# Altium PCB TM1638_10.PcbDoc
Units mil, origin at the board's own origin, x right, y up, seen from the top; angles counter-clockwise.
Board outline 3950 x 2760 mil, 2 copper layers (Top Layer, Bottom Layer); 45 components, 31 nets, 145 pads, 59 vias.
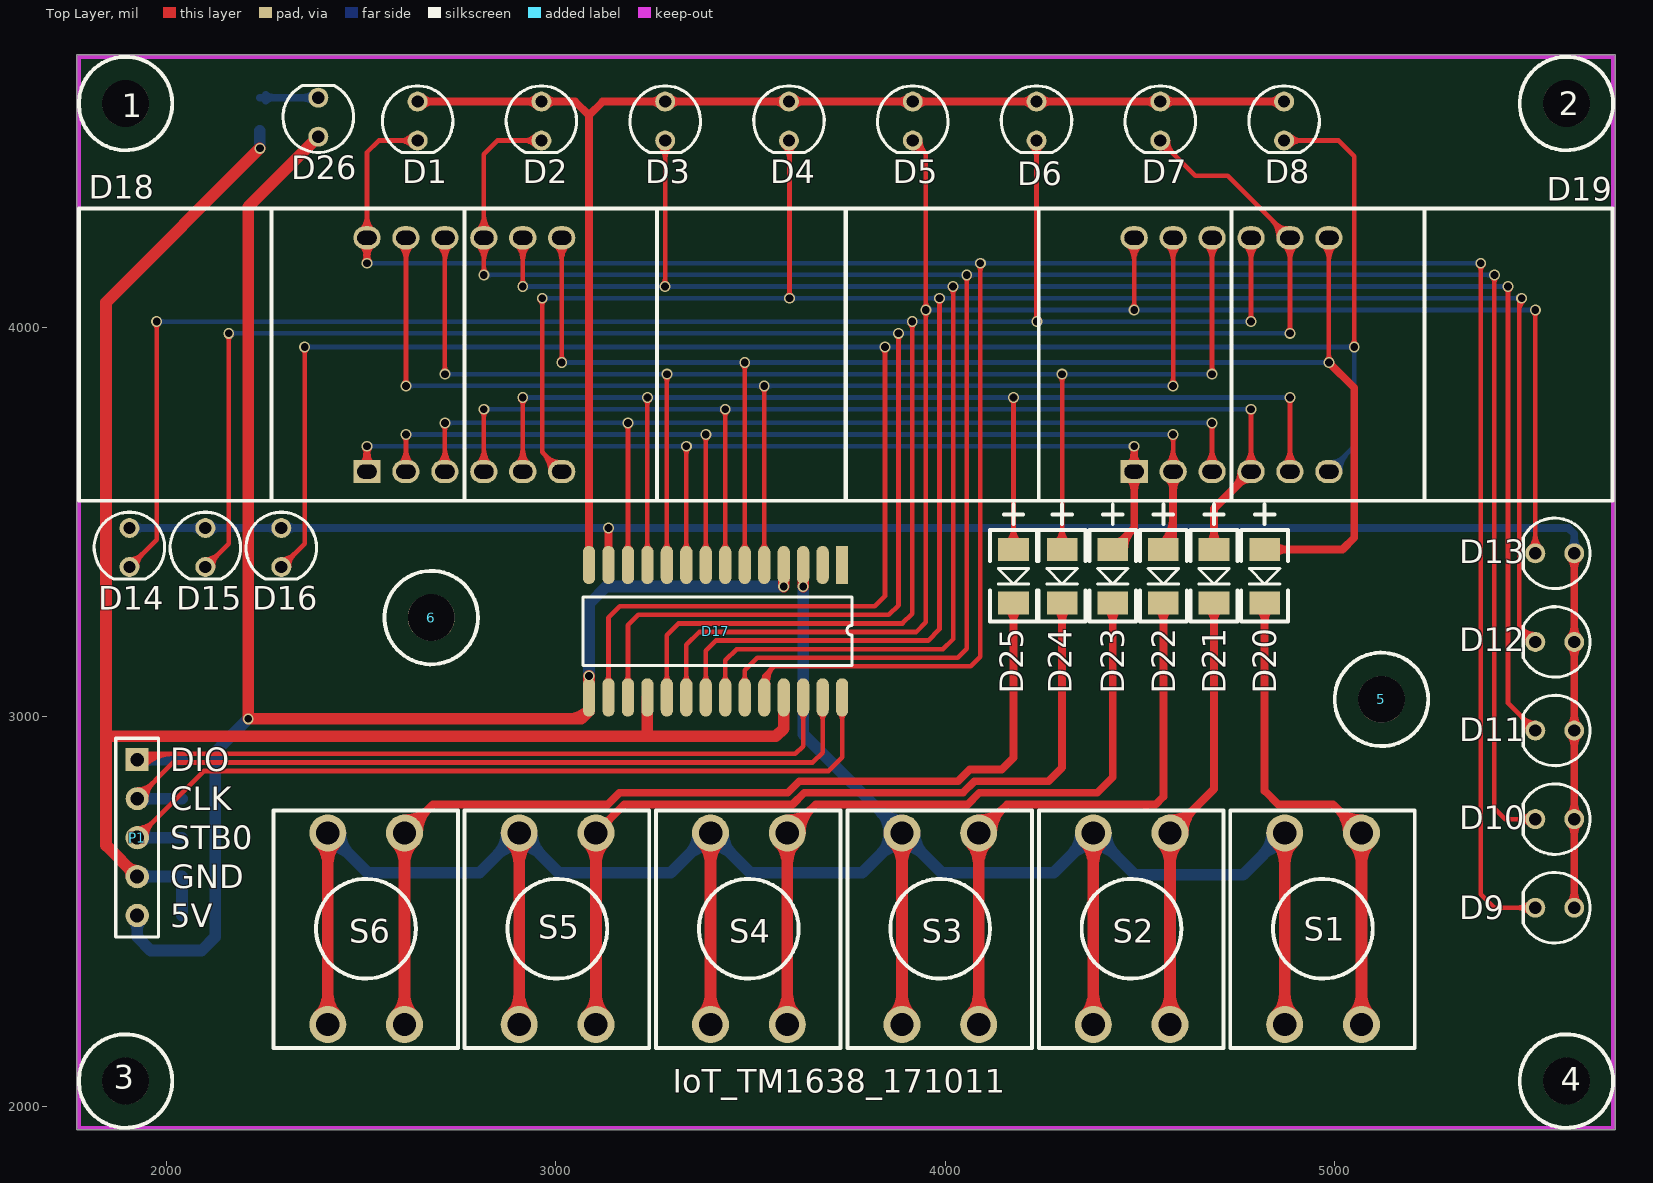
[diagram p0: Top Layer view]
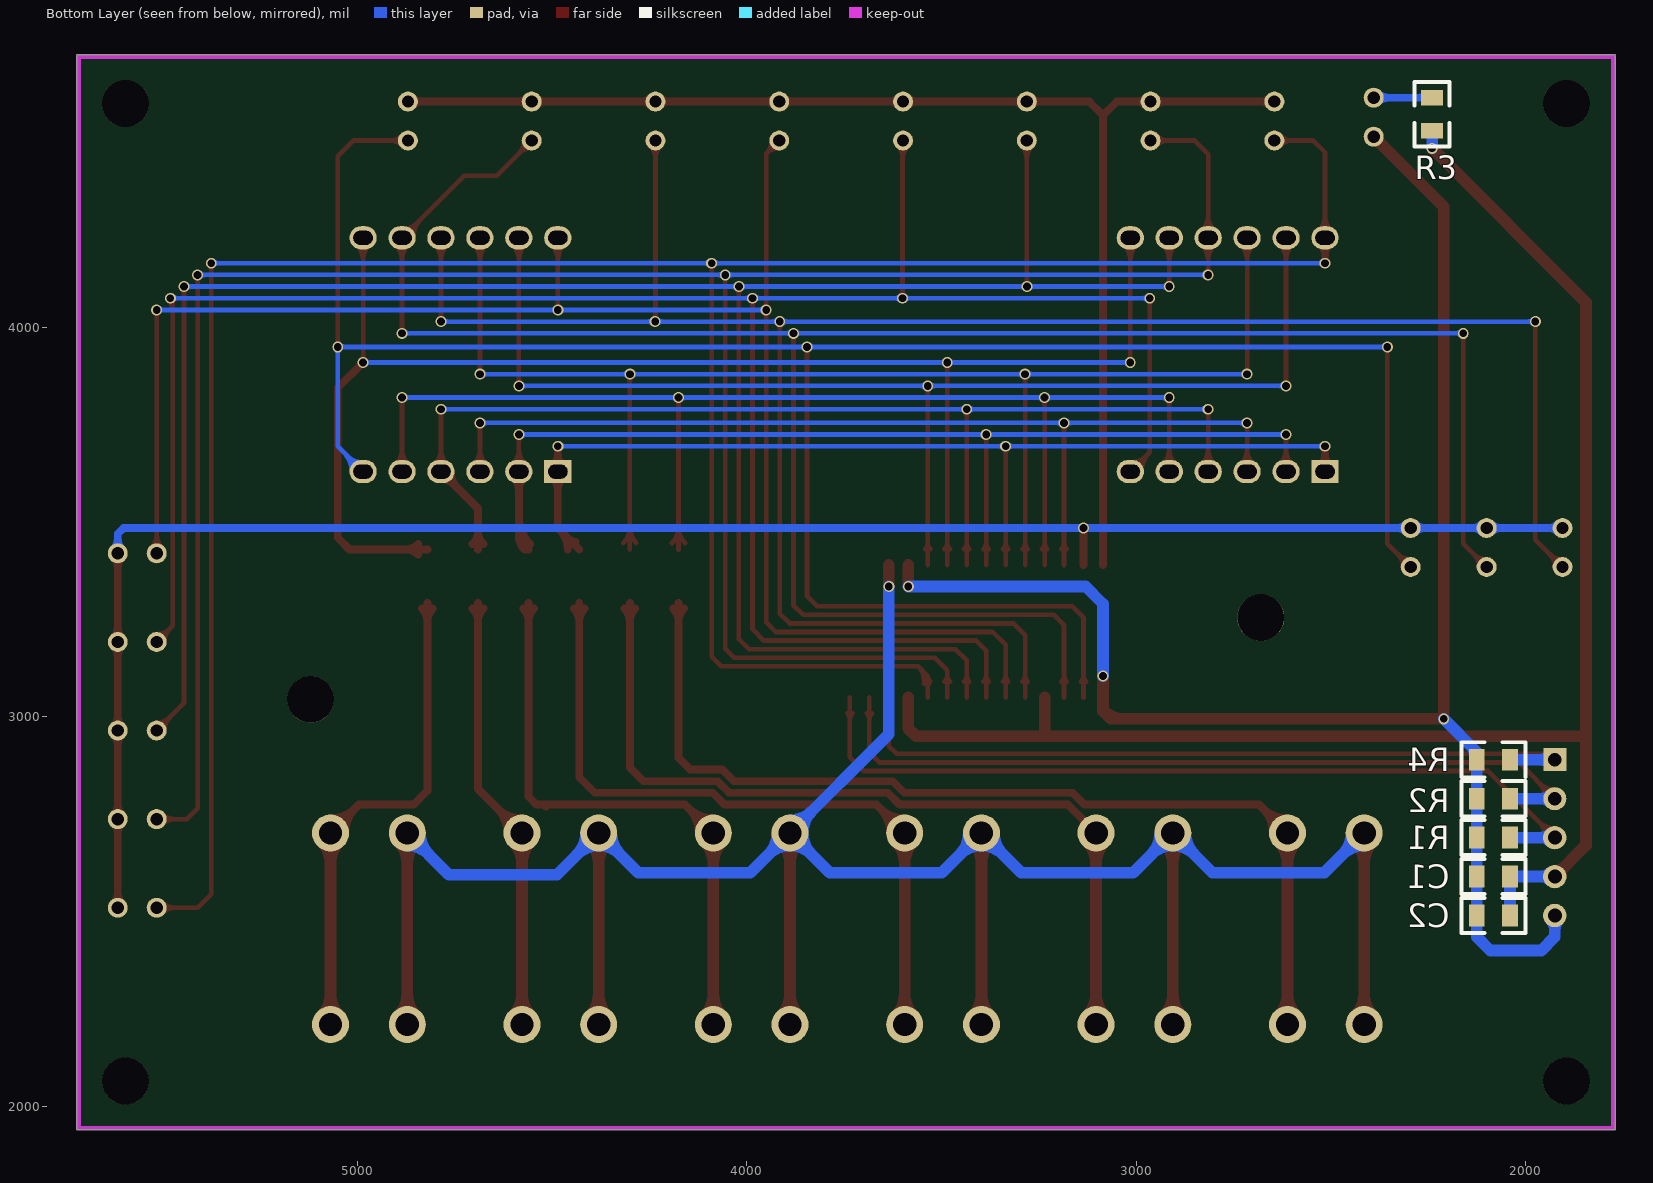
[diagram p1: Bottom Layer view, seen from below]

## Layer stack, top to bottom
Top Layer: signal copper 1.4
Dielectric: dielectric 12.6, FR-4, Dk 4.8
Bottom Layer: signal copper 1.4

## Board outline
1770,4700 1770,1940 5720,1940 5720,4700

## Design rules (kind name [scope] priority, off if disabled: settings)
Clearance [All] p1: gap=10
ComponentClearance [All] p1 off: gap=10 collisioncheckmode=3 verticalgap=10 showdistances=TRUE
Height [All] p1 off: minheight=0 maxheight=1000 prefheight=500
PolygonConnect [All] p1: connectstyle=Relief reliefconductorwidth=10 reliefentries=4 polygonreliefangle="90 Angle"
RoutingVias [All] p1: holewidth=20 width=28 viastyle="Through Hole" minholewidth=20 minwidth=28 maxholewidth=20 maxwidth=28
SilkToSilkClearance [All] p1 off: silktosilkclearance=10
SilkscreenOverComponentPads [All] p1 off: minsilkscreentomaskgap=10
SolderMaskExpansion [All] p1: expansion=4
Width [All] p1: maxlimit=30 minlimit=12 preferedwidth=12
24 further rules are at their usual default settings.

## Components (designator, comment, footprint, x,y, rotation, side; value= is the part's Value field where it differs from the comment)
1 "SIP1" hole 1895,4575 r90 top
2 "SIP1" hole 5595,4575 r90 top
3 "SIP1" hole 1895,2065 r90 top
4 "SIP1" hole 5595,2065 r90 top
5 "SIP1" hole 5120,3045 r90 top
6 "SIP1" hole 2680,3255 r90 top
C1 "Cap Pol3" 0805 2165,2545 r180 bottom
C2 "104" 0805 2000,2535 r0 bottom
D1 "LED3" LED0 2645,4530 r270 top
D2 "LED3" LED0 2962.86,4530 r270 top
D3 "LED3" LED0 3280.71,4530 r270 top
D4 "LED3" LED0 3598.57,4530 r270 top
D5 "LED3" LED0 3916.43,4530 r270 top
D6 "LED3" LED0 4234.29,4530 r270 top
D7 "LED3" LED0 4552.14,4530 r270 top
D8 "LED3" LED0 4870,4530 r270 top
D9 "LED3" LED0 5565,2510 r180 top
D10 "LED3" LED0 5565,2737.5 r180 top
D11 "LED3" LED0 5565,2965 r180 top
D12 "LED3" LED0 5565,3192.5 r180 top
D13 "LED3" LED0 5565,3420 r180 top
D14 "LED3" LED0 1905,3435 r270 top
D15 "LED3" LED0 2100,3435 r270 top
D16 "LED3" LED0 2295,3435 r270 top
D17 "TM1638" SOP28 3735,3390 r270 top locked
D18 "LED4" LED4 1775,3555 r0 top locked
D19 "LED4" LED4 3745,3555 r0 top locked
D20 "Diode 1N4006" 1N4148 4760,3480 r270 top
D21 "Diode 1N4006" 1N4148 4630,3480 r270 top
D22 "Diode 1N4006" 1N4148 4500,3480 r270 top
D23 "Diode 1N4006" 1N4148 4370,3480 r270 top
D24 "Diode 1N4006" 1N4148 4240,3480 r270 top
D25 "Diode 1N4006" 1N4148 4115,3480 r270 top
D26 "LED0" LED0 2390,4540 r90 top
P1 "MHDR1X5" CON5 1925,2890 r270 top
R1 "Res2" 0805 2000,2735 r0 bottom
R2 "Res2" 0805 2000,2835 r0 bottom
R3 "Res2" 0805 2195,4465 r90 bottom
R4 "Res2" 0805 2000,2935 r0 bottom
S1 "SW-PB" KEY 4968.57,2455 r90 top locked
S2 "SW-PB" KEY 4477.14,2455 r90 top locked
S3 "SW-PB" KEY 3985.71,2455 r90 top locked
S4 "SW-PB" KEY 3494.29,2455 r90 top locked
S5 "SW-PB" KEY 3002.86,2455 r90 top locked
S6 "SW-PB" KEY 2511.43,2455 r90 top locked

## Footprints (in the part's own frame and the unit in brackets; to place one, negate y for a bottom-side part, rotate by r counter-clockwise, add the part's x,y. Pads: shape width x height; smd on the part's side, far side on the other; paste and mask are expansions set on the pad)
1N4148 [mm]
  rect 1.5x2 smd: 1(1.27,1.524) 2(4.77,1.524)
  silkscreen extent -1.65,0 5.97,3.05
0805 [mil]
  rect 40x56 smd: 1(40,45) 2(125,45)
  silkscreen extent 0,0 165,90
CON5 [mil]
  rect 59.06x59.06 hole 35.43: 1(0,0)
  round 59.06 hole 35.43: 2(100,0)
  round 60 hole 36: 3(200,0) 4(300,0) 5(400,0)
  silkscreen extent -55,-55 455,55
hole [mil]
  round 120 hole 120: ""(0,0)
  silkscreen extent -120,-120 120,120
KEY [mil]
  round 95 hole 60: 1(-245,97) 1(247,97) 2(-245,-100) 2(247,-100)
  silkscreen extent -305,-237 305,237
LED0 [mm]
  round 1.3 hole 0.8: 1(-1.27,0) 2(1.27,0)
  silkscreen extent -2.3,-2.3 2.06,2.3
LED4 [mil]
  rect 70x60 hole 36 slot 50 at 0 deg: 1(740,75)
  oval 70x60 hole 36 slot 50 at 0 deg: 2(840,75) 3(940,75) 4(1040,75) 5(1140,75) 6(1240,75) 7(1240,675) 8(1140,675) 9(1040,675) 10(940,675) 11(840,675) 12(740,675)
  silkscreen extent 0,0 1968,750
SOP28 [mm]
  rect 2.5x0.8 smd: 1(0,0)
  oval 2.5x0.8 smd: 2(0,-1.27) 3(0,-2.54) 4(0,-3.81) 5(0,-5.08) 6(0,-6.35) 7(0,-7.62) 8(0,-8.89) 9(0,-10.16) 10(0,-11.43) 11(0,-12.7) 12(0,-13.97) 13(0,-15.24) 14(0,-16.51) 15(8.636,-16.51) 16(8.636,-15.24) 17(8.636,-13.97) 18(8.636,-12.7) 19(8.636,-11.43) 20(8.636,-10.16) 21(8.636,-8.89) 22(8.636,-7.62) 23(8.636,-6.35) 24(8.636,-5.08) 25(8.636,-3.81) 26(8.636,-2.54) 27(8.636,-1.27) 28(8.636,0)
  silkscreen extent 2.09,-16.89 6.56,0.64

## Part data
1 2 3 4 5 6: "Variable Resistor"
C1: "Polarized Capacitor (Surface Mount)"
C2: library part "Cap Semi", "Capacitor (Semiconductor SIM Model)"
D1 D2 D3 D4 D5 D6 D7 D8 D9 D10 D11 D12 D13 D14 D15 D16: "Typical BLUE SiC LED"
D18 D19: library part LED_N4
D20 D21 D22 D23 D24 D25: "1 Amp General Purpose Rectifier"
D26: "Typical INFRARED GaAs LED"
P1: "Header, 5-Pin"
R1 R2 R3 R4: "Resistor"
S1 S2 S3 S4 S5 S6: "Switch"

## Via types
v1: diameter 28, hole 20, Top Layer to Bottom Layer, 59 vias

## Nets (pads, with @x,y where several pads share a name; then routed paths per layer and width w, separated by ;. In a path a pad name is that pad's centre, name@x,y a point inside that pad or via, vN(x,y) a via of type N, cw(c..) or ccw(c..) an arc to the next point about the centre after c; other vN are vias at no path point)
CLK: D17.27 P1.2 R2.1 | length 2247.2
  Top Layer w12: P1.2 2018,2883 3660,2883 3685,2908 D17.27 ; P1.2@1925,2813.53 ccw(c1925,2870.33) 1965.16,2830.16 ccw(c2005.33,2790) P1.2@1948.53,2790 ; D17.27@3678.11,3009.64 cw(c3661.47,2993) 3685,2993 cw(c3708.53,2993) D17.27@3691.89,3009.64
  Bottom Layer w30: P1.2 R2.1 ; P1.2@1935.27,2779.73 cw(c1960.07,2754.93) 1960.07,2790 cw(c1960.07,2825.07) P1.2@1935.27,2800.27
DIO: D17.26 P1.1 R4.1 | length 2242.8
  Top Layer w12: P1.1@1924.67,2890.33 cw(c1960.07,2854.93) 1960.07,2905 ; P1.1 1940,2905 3615,2905 3635,2925 D17.26 ; P1.1@1933.15,2881.85 cw(c1989.04,2825.96) 1989.04,2905 ; P1.1@1941.64,2873.36 cw(c2018.01,2796.99) 2018.01,2905 ; D17.26@3628.11,3009.64 cw(c3611.47,2993) 3635,2993 cw(c3658.53,2993) D17.26@3641.89,3009.64
  Bottom Layer w30: P1.1 R4.1 ; P1.1@1935.27,2879.73 cw(c1960.07,2854.93) 1960.07,2890 cw(c1960.07,2925.07) P1.1@1935.27,2900.27
GND: C1.2 C2.1 D17.18 D17.25 P1.4 R3.1 | length 4368.8
  Top Layer w30: P1.4@1910,2590 ccw(c1873.79,2590) 1899.39,2615.61 ccw(c1925,2641.21) P1.4@1925,2605 ; P1.4 1845,2670 1845,2950 ; v1(2240,4460) 1845,4065 1845,2950 ; D17.18 3235,2950 ; D17.25 3585,2970 3565,2950 3235,2950 ; 1845,2950 3235,2950
  Bottom Layer w30: P1.4 C1.2 C2.1 ; P1.4@1935.61,2579.39 cw(c1961.21,2553.79) 1961.21,2590 cw(c1961.21,2626.21) P1.4@1935.61,2600.61 ; v1(2240,4460) R3.1
GR1: D1.2 D9.2 D17.24 D18.12 | length 7420.4
  Top Layer w12: D18.12@2498.03,4213.03 cw(c2457.06,4172.06) 2515,4172.06 cw(c2572.94,4172.06) D18.12@2531.97,4213.03 ; D18.12@2498.03,4246.97 ccw(c2457.06,4287.94) 2515,4287.94 ccw(c2572.94,4287.94) D18.12@2531.97,4246.97 ; v1@2508.07,4169 ccw(c2485.94,4181.78) 2510.62,4188.39 ; v1@2509.34,4170.66 ccw(c2495.69,4184.31) 2515,4184.31 ccw(c2534.31,4184.31) v1@2520.66,4170.66 ; v1@2511,4171.93 ccw(c2504.46,4183.25) 2517.09,4179.87 ; 2512.91,4179.87 ccw(c2525.54,4183.25) v1@2519,4171.93 ; v1(2515,4165) D18.12 2515,4450 2545,4480 D1.2 ; 2519.38,4188.39 ccw(c2544.06,4181.78) v1@2521.93,4169 ; D1.2@2631.15,4466.15 ccw(c2597.7,4432.7) 2597.7,4480 ccw(c2597.7,4527.3) D1.2@2631.15,4493.85 ; D17.24@3528.57,3090.79 ccw(c3516.09,3105) 3535,3105 ; D17.24@3532.77,3083.17 cw(c3567.81,3087.82) 3542.81,3112.81 ; D17.24 3535,3105 ; D17.24@3541.43,3090.79 cw(c3553.91,3105) 3535,3105 ; D17.24@3544.66,3084.75 cw(c3598.15,3091.84) 3560,3130 ; v1@4084.34,4159.34 cw(c4070.69,4145.69) 4090,4145.69 cw(c4109.31,4145.69) v1@4095.66,4159.34 ; v1(4090,4165) 4090,3155 4065,3130 3560,3130 ; v1@5369.34,4159.34 cw(c5355.69,4145.69) 5375,4145.69 cw(c5394.31,4145.69) v1@5380.66,4159.34 ; v1(5375,4165) 5375,2545 5410,2510 D9.2 ; D9.2@5501.15,2496.15 ccw(c5467.7,2462.7) 5467.7,2510 ccw(c5467.7,2557.3) D9.2@5501.15,2523.85 ; 3535,3105 3560,3130
  Bottom Layer w12: v1(2515,4165) v1(4090,4165) v1(5375,4165) ; v1@2520.66,4159.34 cw(c2534.31,4145.69) 2534.31,4165 cw(c2534.31,4184.31) v1@2520.66,4170.66 ; v1@4084.34,4159.34 ccw(c4070.69,4145.69) 4070.69,4165 ccw(c4070.69,4184.31) v1@4084.34,4170.66 ; v1@4095.66,4159.34 cw(c4109.31,4145.69) 4109.31,4165 cw(c4109.31,4184.31) v1@4095.66,4170.66 ; v1@5369.34,4159.34 ccw(c5355.69,4145.69) 5355.69,4165 ccw(c5355.69,4184.31) v1@5369.34,4170.66
GR2: D2.2 D10.2 D17.23 D18.9 | length 6756.5
  Top Layer w12: D18.9@2798.03,4213.03 cw(c2757.06,4172.06) 2815,4172.06 cw(c2872.94,4172.06) D18.9@2831.97,4213.03 ; D18.9@2798.03,4246.97 ccw(c2757.06,4287.94) 2815,4287.94 ccw(c2872.94,4287.94) D18.9@2831.97,4246.97 ; v1@2809.34,4140.66 ccw(c2795.69,4154.31) 2815,4154.31 ccw(c2834.31,4154.31) v1@2820.66,4140.66 ; v1(2815,4135) D18.9 2815,4445 2850,4480 D2.2 ; D2.2@2949,4466.15 ccw(c2915.56,4432.7) 2915.56,4480 ccw(c2915.56,4527.29) D2.2@2949,4493.85 ; D17.23@3478.11,3090.36 ccw(c3461.47,3107) 3485,3107 ccw(c3508.53,3107) D17.23@3491.89,3090.36 ; D17.23 3485,3120 3517,3152 4032,3152 4055,3175 v1(4055,4135) ; v1@4049.34,4129.34 cw(c4035.69,4115.69) 4055,4115.69 cw(c4074.31,4115.69) v1@4060.66,4129.34 ; v1@5404.34,4129.34 cw(c5390.69,4115.69) 5410,4115.69 cw(c5429.31,4115.69) v1@5415.66,4129.34 ; v1(5410,4135) 5410,2765 5437.5,2737.5 D10.2 ; D10.2@5501.15,2723.65 ccw(c5467.7,2690.2) 5467.7,2737.5 ccw(c5467.7,2784.8) D10.2@5501.15,2751.35
  Bottom Layer w12: v1(2815,4135) v1(4055,4135) v1(5410,4135) ; v1@2820.66,4129.34 cw(c2834.31,4115.69) 2834.31,4135 cw(c2834.31,4154.31) v1@2820.66,4140.66 ; v1@4049.34,4129.34 ccw(c4035.69,4115.69) 4035.69,4135 ccw(c4035.69,4154.31) v1@4049.34,4140.66 ; v1@4060.66,4129.34 cw(c4074.31,4115.69) 4074.31,4135 cw(c4074.31,4154.31) v1@4060.66,4140.66 ; v1@5404.34,4129.34 ccw(c5390.69,4115.69) 5390.69,4135 ccw(c5390.69,4154.31) v1@5404.34,4140.66
GR3: D3.2 D11.2 D17.22 D18.8 | length 6387
  Top Layer w12: D18.8@2898.03,4213.03 cw(c2857.06,4172.06) 2915,4172.06 cw(c2972.94,4172.06) D18.8@2931.97,4213.03 ; v1@2909.34,4110.66 ccw(c2895.69,4124.31) 2915,4124.31 ccw(c2934.31,4124.31) v1@2920.66,4110.66 ; v1(2915,4105) D18.8 ; D3.2@3266.86,4466.15 cw(c3233.42,4432.7) 3280.71,4432.7 cw(c3328.01,4432.7) D3.2@3294.57,4466.15 ; v1@3274.34,4110.66 ccw(c3258.96,4126.04) 3280.71,4126.04 ; v1(3280,4105) 3280.71,4105.71 D3.2 ; 3280.71,4122.59 ccw(c3297.59,4122.59) v1@3285.66,4110.66 ; D17.22@3428.11,3090.36 ccw(c3411.47,3107) 3435,3107 ccw(c3458.53,3107) D17.22@3441.89,3090.36 ; D17.22 3435,3145 3464,3174 3994,3174 4020,3200 v1(4020,4105) ; v1@4014.34,4099.34 cw(c4000.69,4085.69) 4020,4085.69 cw(c4039.31,4085.69) v1@4025.66,4099.34 ; v1@5439.34,4099.34 cw(c5425.69,4085.69) 5445,4085.69 cw(c5464.31,4085.69) v1@5450.66,4099.34 ; v1(5445,4105) 5445,3035 D11.2 ; D11.2@5495.41,2965 ccw(c5448.11,2965) 5481.56,2998.44 ccw(c5515,3031.89) D11.2@5515,2984.59
  Bottom Layer w12: v1(2915,4105) v1(4020,4105) v1(5445,4105) ; v1@2920.66,4099.34 cw(c2934.31,4085.69) 2934.31,4105 cw(c2934.31,4124.31) v1@2920.66,4110.66 ; v1@3274.34,4099.34 ccw(c3260.69,4085.69) 3260.69,4105 ccw(c3260.69,4124.31) v1@3274.34,4110.66 ; v1@3285.66,4099.34 cw(c3299.31,4085.69) 3299.31,4105 cw(c3299.31,4124.31) v1@3285.66,4110.66 ; v1@4014.34,4099.34 ccw(c4000.69,4085.69) 4000.69,4105 ccw(c4000.69,4124.31) v1@4014.34,4110.66 ; v1@4025.66,4099.34 cw(c4039.31,4085.69) 4039.31,4105 cw(c4039.31,4124.31) v1@4025.66,4110.66 ; v1@5439.34,4099.34 ccw(c5425.69,4085.69) 5425.69,4105 ccw(c5425.69,4124.31) v1@5439.34,4110.66
GR4: D4.2 D12.2 D17.21 D18.6 | length 6496.2
  Top Layer w12: v1@2959.34,4069.34 cw(c2945.69,4055.69) 2965,4055.69 cw(c2984.31,4055.69) v1@2970.66,4069.34 ; v1(2965,4075) 2965,3680 D18.6 ; 2965.49,3679.51 cw(c2915.99,3630) D18.6@2986,3630 ; 2977.56,3667.44 ccw(c3010,3699.87) D18.6@3010,3654 ; 2985.98,3659.02 cw(c2956.96,3630) D18.6@2998,3630 ; D17.21@3378.11,3090.36 ccw(c3361.47,3107) 3385,3107 ccw(c3408.53,3107) D17.21@3391.89,3090.36 ; D17.21 3385,3170 3411,3196 3956,3196 3985,3225 v1(3985,4075) ; D4.2@3584.72,4466.15 cw(c3547.83,4429.25) 3600,4429.25 ; v1@3594.34,4080.66 ccw(c3580.69,4094.31) 3600,4094.31 ccw(c3619.31,4094.31) v1@3605.66,4080.66 ; D4.2 3600,4478.57 v1(3600,4075) ; 3600,4436.15 cw(c3642.42,4436.15) D4.2@3612.42,4466.15 ; v1@3979.34,4069.34 cw(c3965.69,4055.69) 3985,4055.69 cw(c4004.31,4055.69) v1@3990.66,4069.34 ; 5473.41,4039.78 cw(c5515.22,4039.78) v1@5485.66,4069.34 ; v1(5480,4075) 5473.41,4068.41 5473.41,3234.09 D12.2 ; D12.2@5495.41,3192.5 ccw(c5448.11,3192.5) 5481.56,3225.94 ccw(c5515,3259.39) D12.2@5515,3212.09
  Bottom Layer w12: v1(2965,4075) v1(3600,4075) v1(3985,4075) v1(5480,4075) ; v1@2970.66,4069.34 cw(c2984.31,4055.69) 2984.31,4075 cw(c2984.31,4094.31) v1@2970.66,4080.66 ; v1@3594.34,4069.34 ccw(c3580.69,4055.69) 3580.69,4075 ccw(c3580.69,4094.31) v1@3594.34,4080.66 ; v1@3605.66,4069.34 cw(c3619.31,4055.69) 3619.31,4075 cw(c3619.31,4094.31) v1@3605.66,4080.66 ; v1@3979.34,4069.34 ccw(c3965.69,4055.69) 3965.69,4075 ccw(c3965.69,4094.31) v1@3979.34,4080.66 ; v1@3990.66,4069.34 cw(c4004.31,4055.69) 4004.31,4075 cw(c4004.31,4094.31) v1@3990.66,4080.66 ; v1@5474.34,4069.34 ccw(c5460.69,4055.69) 5460.69,4075 ccw(c5460.69,4094.31) v1@5474.34,4080.66
GR5: D5.2 D13.2 D17.20 D19.12 | length 4919.2
  Top Layer w12: D17.20@3328.11,3090.36 ccw(c3311.47,3107) 3335,3107 ccw(c3358.53,3107) D17.20@3341.89,3090.36 ; D17.20 3335,3185 3368,3218 3925,3218 3950,3243 v1(3950,4045) 3950,4446.43 D5.2 ; D5.2@3916.43,4460.41 cw(c3916.43,4413.11) 3949.87,4446.56 cw(c3983.31,4480) D5.2@3936.02,4480 ; v1@3944.34,4039.34 cw(c3930.69,4025.69) 3950,4025.69 cw(c3969.31,4025.69) v1@3955.66,4039.34 ; v1@3944.34,4050.66 ccw(c3930.69,4064.31) 3950,4064.31 ccw(c3969.31,4064.31) v1@3955.66,4050.66 ; D19.12@4468.03,4213.03 cw(c4427.06,4172.06) 4485,4172.06 cw(c4542.94,4172.06) D19.12@4501.97,4213.03 ; v1@4479.34,4050.66 ccw(c4465.69,4064.31) 4485,4064.31 ccw(c4504.31,4064.31) v1@4490.66,4050.66 ; v1(4485,4045) D19.12 ; D13.2@5501.15,3433.85 ccw(c5467.7,3467.3) 5515,3467.3 ccw(c5562.3,3467.3) D13.2@5528.85,3433.85 ; v1@5509.34,4039.34 cw(c5495.69,4025.69) 5515,4025.69 cw(c5534.31,4025.69) v1@5520.66,4039.34 ; D13.2 v1(5515,4045)
  Bottom Layer w12: v1(3950,4045) v1(4485,4045) v1(5515,4045) ; v1@3955.66,4039.34 cw(c3969.31,4025.69) 3969.31,4045 cw(c3969.31,4064.31) v1@3955.66,4050.66 ; v1@4479.34,4039.34 ccw(c4465.69,4025.69) 4465.69,4045 ccw(c4465.69,4064.31) v1@4479.34,4050.66 ; v1@4490.66,4039.34 cw(c4504.31,4025.69) 4504.31,4045 cw(c4504.31,4064.31) v1@4490.66,4050.66 ; v1@5509.34,4039.34 ccw(c5495.69,4025.69) 5495.69,4045 ccw(c5495.69,4064.31) v1@5509.34,4050.66
GR6: D6.2 D14.2 D17.19 D19.9 | length 6292
  Top Layer w12: D14.2 1975,3455 v1(1975,4015) ; D14.2@1905,3404.59 ccw(c1905,3451.89) 1938.44,3418.44 ccw(c1971.89,3385) D14.2@1924.59,3385 ; v1@1969.34,4009.34 cw(c1955.69,3995.69) 1975,3995.69 cw(c1994.31,3995.69) v1@1980.66,4009.34 ; D17.19@3278.11,3090.36 ccw(c3261.47,3107) 3285,3107 ccw(c3308.53,3107) D17.19@3291.89,3090.36 ; D17.19 3285,3210 3315,3240 3890,3240 3915,3265 v1(3915,4015) ; v1@3909.34,4009.34 cw(c3895.69,3995.69) 3915,3995.69 cw(c3934.31,3995.69) v1@3920.66,4009.34 ; D6.2@4220.43,4466.15 cw(c4186.99,4432.7) 4234.29,4432.7 cw(c4281.58,4432.7) D6.2@4248.14,4466.15 ; v1@4229.34,4020.66 ccw(c4217.41,4032.59) 4234.29,4032.59 ; 4234.29,4036.04 ccw(c4256.04,4036.04) v1@4240.66,4020.66 ; D6.2 4234.29,4015.71 v1(4235,4015) ; D19.9@4768.03,4213.03 cw(c4727.06,4172.06) 4785,4172.06 cw(c4842.94,4172.06) D19.9@4801.97,4213.03 ; v1@4779.34,4020.66 ccw(c4765.69,4034.31) 4785,4034.31 ccw(c4804.31,4034.31) v1@4790.66,4020.66 ; v1(4785,4015) D19.9
  Bottom Layer w12: v1(1975,4015) v1(3915,4015) v1(4235,4015) v1(4785,4015) ; v1@1980.66,4009.34 cw(c1994.31,3995.69) 1994.31,4015 cw(c1994.31,4034.31) v1@1980.66,4020.66 ; v1@3909.34,4009.34 ccw(c3895.69,3995.69) 3895.69,4015 ccw(c3895.69,4034.31) v1@3909.34,4020.66 ; v1@3920.66,4009.34 cw(c3934.31,3995.69) 3934.31,4015 cw(c3934.31,4034.31) v1@3920.66,4020.66 ; v1@4229.34,4009.34 ccw(c4215.69,3995.69) 4215.69,4015 ccw(c4215.69,4034.31) v1@4229.34,4020.66 ; v1@4240.66,4009.34 cw(c4254.31,3995.69) 4254.31,4015 cw(c4254.31,4034.31) v1@4240.66,4020.66 ; v1@4779.34,4009.34 ccw(c4765.69,3995.69) 4765.69,4015 ccw(c4765.69,4034.31) v1@4779.34,4020.66
GR7: D7.2 D15.2 D17.17 D19.8 | length 6243
  Top Layer w12: D15.2 2160,3445 v1(2160,3985) ; D15.2@2100,3404.59 ccw(c2100,3451.89) 2133.44,3418.44 ccw(c2166.89,3385) D15.2@2119.59,3385 ; v1@2154.34,3979.34 cw(c2140.69,3965.69) 2160,3965.69 cw(c2179.31,3965.69) v1@2165.66,3979.34 ; D17.17@3178.11,3090.36 ccw(c3161.47,3107) 3185,3107 ccw(c3208.53,3107) D17.17@3191.89,3090.36 ; D17.17 3185,3235 3212,3262 3855,3262 3880,3287 v1(3880,3985) ; v1@3874.34,3979.34 cw(c3860.69,3965.69) 3880,3965.69 cw(c3899.31,3965.69) v1@3885.66,3979.34 ; D7.2@4552.14,4460.41 cw(c4552.14,4413.11) 4585.59,4446.56 cw(c4619.03,4480) D7.2@4571.73,4480 ; D7.2 4642.14,4390 4725,4390 D19.8 v1(4885,3985) ; 4835.49,4279.51 cw(c4785.99,4230) D19.8@4856,4230 ; 4847.56,4267.44 ccw(c4880,4299.87) D19.8@4880,4254 ; 4855.98,4259.02 cw(c4826.96,4230) D19.8@4868,4230 ; D19.8@4868.03,4213.03 cw(c4827.06,4172.06) 4885,4172.06 cw(c4942.94,4172.06) D19.8@4901.97,4213.03 ; v1@4879.34,3990.66 ccw(c4865.69,4004.31) 4885,4004.31 ccw(c4904.31,4004.31) v1@4890.66,3990.66
  Bottom Layer w12: v1(2160,3985) v1(3880,3985) v1(4885,3985) ; v1@2165.66,3979.34 cw(c2179.31,3965.69) 2179.31,3985 cw(c2179.31,4004.31) v1@2165.66,3990.66 ; v1@3874.34,3979.34 ccw(c3860.69,3965.69) 3860.69,3985 ccw(c3860.69,4004.31) v1@3874.34,3990.66 ; v1@3885.66,3979.34 cw(c3899.31,3965.69) 3899.31,3985 cw(c3899.31,4004.31) v1@3885.66,3990.66 ; v1@4879.34,3979.34 ccw(c4865.69,3965.69) 4865.69,3985 ccw(c4865.69,4004.31) v1@4879.34,3990.66
GR8: D8.2 D16.2 D17.16 D19.6 | length 6447.6
  Top Layer w12: D16.2 2355,3445 v1(2355,3950) ; D16.2@2295,3404.59 ccw(c2295,3451.89) 2328.44,3418.44 ccw(c2361.89,3385) D16.2@2314.59,3385 ; v1@2349.34,3944.34 cw(c2335.69,3930.69) 2355,3930.69 cw(c2374.31,3930.69) v1@2360.66,3944.34 ; D17.16@3128.11,3090.36 ccw(c3111.47,3107) 3135,3107 ccw(c3158.53,3107) D17.16@3141.89,3090.36 ; D17.16 3135,3255 3164,3284 3819,3284 3845,3310 v1(3845,3950) ; v1@3839.34,3944.34 cw(c3825.69,3930.69) 3845,3930.69 cw(c3864.31,3930.69) v1@3850.66,3944.34 ; D8.2 5010,4480 5050,4440 v1(5050,3950) ; D8.2@4883.85,4466.15 cw(c4917.3,4432.7) 4917.3,4480 cw(c4917.3,4527.3) D8.2@4883.85,4493.85 ; v1@5044.34,3955.66 ccw(c5030.69,3969.31) 5050,3969.31 ccw(c5069.31,3969.31) v1@5055.66,3955.66
  Bottom Layer w12: v1(2355,3950) v1(3845,3950) v1(5050,3950) 5050,3695 D19.6 ; v1@2360.66,3944.34 cw(c2374.31,3930.69) 2374.31,3950 cw(c2374.31,3969.31) v1@2360.66,3955.66 ; v1@3839.34,3944.34 ccw(c3825.69,3930.69) 3825.69,3950 ccw(c3825.69,3969.31) v1@3839.34,3955.66 ; v1@3850.66,3944.34 cw(c3864.31,3930.69) 3864.31,3950 cw(c3864.31,3969.31) v1@3850.66,3955.66 ; D19.6@4990,3654 ccw(c4990,3699.87) 5022.44,3667.44 ; D19.6@5002,3630 cw(c5043.04,3630) 5014.02,3659.02 ; D19.6@5014,3630 cw(c5084.01,3630) 5034.51,3679.51 ; v1@5044.34,3955.66 cw(c5030.69,3969.31) 5030.69,3950 cw(c5030.69,3930.69) 5044.34,3944.34 cw(c5030.69,3930.69) 5050,3930.69 cw(c5069.31,3930.69) v1@5055.66,3944.34
K3: D17.3 S1.1 S2.1 S3.1 S4.1 S5.1 S6.1 | length 9463.6
  Top Layer w30: S6.1@2391.45,2232.98 ccw(c2335.97,2288.46) 2414.43,2288.46 ccw(c2492.89,2288.46) S6.1@2437.41,2232.98 ; S6.1@2391.45,2679.02 cw(c2335.97,2623.54) 2414.43,2623.54 cw(c2492.89,2623.54) S6.1@2437.41,2679.02 ; S6.1@2414.43,2210 S6.1@2414.43,2702 ; S5.1@2882.88,2232.98 ccw(c2827.4,2288.46) 2905.86,2288.46 ccw(c2984.32,2288.46) S5.1@2928.84,2232.98 ; S5.1@2882.88,2679.02 cw(c2827.4,2623.54) 2905.86,2623.54 cw(c2984.32,2623.54) S5.1@2928.84,2679.02 ; S5.1@2905.86,2210 S5.1@2905.86,2702 ; S4.1@3374.3,2232.98 ccw(c3318.82,2288.46) 3397.29,2288.46 ccw(c3475.75,2288.46) S4.1@3420.27,2232.98 ; S4.1@3374.3,2679.02 cw(c3318.82,2623.54) 3397.29,2623.54 cw(c3475.75,2623.54) S4.1@3420.27,2679.02 ; S4.1@3397.29,2210 S4.1@3397.29,2702 ; v1(3635,3335) D17.3 ; S3.1@3865.73,2232.98 ccw(c3810.25,2288.46) 3888.71,2288.46 ccw(c3967.18,2288.46) S3.1@3911.69,2232.98 ; S3.1@3865.73,2679.02 cw(c3810.25,2623.54) 3888.71,2623.54 cw(c3967.18,2623.54) S3.1@3911.69,2679.02 ; S3.1@3888.71,2210 S3.1@3888.71,2702 ; S2.1@4357.16,2232.98 ccw(c4301.68,2288.46) 4380.14,2288.46 ccw(c4458.6,2288.46) S2.1@4403.12,2232.98 ; S2.1@4357.16,2679.02 cw(c4301.68,2623.54) 4380.14,2623.54 cw(c4458.6,2623.54) S2.1@4403.12,2679.02 ; S2.1@4380.14,2210 S2.1@4380.14,2702 ; S1.1@4848.59,2232.98 ccw(c4793.11,2288.46) 4871.57,2288.46 ccw(c4950.03,2288.46) S1.1@4894.55,2232.98 ; S1.1@4848.59,2679.02 cw(c4793.11,2623.54) 4871.57,2623.54 cw(c4950.03,2623.54) S1.1@4894.55,2679.02 ; S1.1@4871.57,2210 S1.1@4871.57,2702
  Bottom Layer w30: S6.1@2414.43,2669.5 cw(c2414.43,2591.04) 2469.91,2646.52 cw(c2525.39,2702) S6.1@2446.93,2702 ; S6.1@2414.43,2702 2516.43,2600 2803.86,2600 2905.86,2702 3007.86,2600 3295.29,2600 3397.29,2702 3499.29,2600 3786.71,2600 S3.1@3888.71,2702 ; S5.1@2873.36,2702 cw(c2794.9,2702) 2850.38,2646.52 cw(c2905.86,2591.04) 2905.86,2669.5 cw(c2905.86,2591.04) 2961.34,2646.52 cw(c3016.82,2702) S5.1@2938.36,2702 ; S4.1@3364.79,2702 cw(c3286.32,2702) 3341.8,2646.52 cw(c3397.29,2591.04) 3397.29,2669.5 cw(c3397.29,2591.04) 3452.77,2646.52 cw(c3508.25,2702) S4.1@3429.79,2702 ; v1(3635,3335) 3635,2955.71 S3.1@3888.71,2702 ; S3.1@3888.71,2734.5 cw(c3888.71,2812.96) 3833.23,2757.48 cw(c3777.75,2702) 3856.21,2702 cw(c3777.75,2702) 3833.23,2646.52 cw(c3888.71,2591.04) 3888.71,2669.5 cw(c3888.71,2591.04) 3944.19,2646.52 cw(c3999.68,2702) S3.1@3921.21,2702 ; S2.1@4347.64,2702 cw(c4269.18,2702) 4324.66,2646.52 cw(c4380.14,2591.04) 4380.14,2669.5 cw(c4380.14,2591.04) 4435.62,2646.52 cw(c4491.1,2702) S2.1@4412.64,2702 ; S1.1@4839.07,2702 cw(c4760.61,2702) 4816.09,2646.52 cw(c4871.57,2591.04) S1.1@4871.57,2669.5 ; S1.1@4871.57,2702 4764.57,2595 4487.14,2595 4380.14,2702 4278.14,2600 3990.71,2600 S3.1@3888.71,2702
NetD20_2: D20.2 S1.2 | length 1730.3
  Top Layer w20: D20.2@4806.19,3278.4 cw(c4772.86,3245.06) 4820,3245.06 cw(c4867.14,3245.06) D20.2@4833.81,3278.4 ; D20.2 4820,2810 4855,2775 4995.57,2775 S1.2@5068.57,2702 ; S1.2@5031.07,2702 ccw(c4940.54,2702) 5004.55,2766.02 ccw(c5068.57,2830.03) S1.2@5068.57,2739.5
  Top Layer w30: S1.2@5045.59,2232.98 ccw(c4990.11,2288.46) 5068.57,2288.46 ccw(c5147.03,2288.46) S1.2@5091.55,2232.98 ; S1.2@5045.59,2679.02 cw(c4990.11,2623.54) 5068.57,2623.54 cw(c5147.03,2623.54) S1.2@5091.55,2679.02 ; S1.2@5068.57,2210 S1.2@5068.57,2702
NetD21_2: D21.2 S2.2 | length 1591.7
  Top Layer w20: S2.2@4577.14,2702 4690,2814.86 D21.2 ; S2.2@4577.14,2739.5 ccw(c4577.14,2830.03) 4641.16,2766.02 ccw(c4705.18,2702) S2.2@4614.64,2702 ; D21.2@4676.19,3278.4 cw(c4642.86,3245.06) 4690,3245.06 cw(c4737.14,3245.06) D21.2@4703.81,3278.4
  Top Layer w30: S2.2@4554.16,2232.98 ccw(c4498.68,2288.46) 4577.14,2288.46 ccw(c4655.6,2288.46) S2.2@4600.12,2232.98 ; S2.2@4554.16,2679.02 cw(c4498.68,2623.54) 4577.14,2623.54 cw(c4655.6,2623.54) S2.2@4600.12,2679.02 ; S2.2@4577.14,2210 S2.2@4577.14,2702
NetD22_2: D22.2 S3.2 | length 1969.8
  Top Layer w20: S3.2@4085.71,2702 4158.71,2775 4515,2775 ; S3.2@4085.71,2739.5 ccw(c4085.71,2830.03) 4149.73,2766.02 ccw(c4213.75,2702) S3.2@4123.21,2702 ; 4515,2770 4515,2775 ; D22.2@4546.19,3278.4 cw(c4512.86,3245.06) 4560,3245.06 cw(c4607.14,3245.06) D22.2@4573.81,3278.4 ; D22.2 4560,2795 4540,2775 4515,2775
  Top Layer w30: S3.2@4062.73,2232.98 ccw(c4007.25,2288.46) 4085.71,2288.46 ccw(c4164.18,2288.46) S3.2@4108.69,2232.98 ; S3.2@4062.73,2679.02 cw(c4007.25,2623.54) 4085.71,2623.54 cw(c4164.18,2623.54) S3.2@4108.69,2679.02 ; S3.2@4085.71,2210 S3.2@4085.71,2702
NetD23_2: D23.2 S4.2 | length 2296.9
  Top Layer w20: S4.2@3594.29,2702 3667.29,2775 4057.57,2775 4087.57,2805 4390,2805 4430,2845 D23.2 ; S4.2@3594.29,2739.5 ccw(c3594.29,2830.03) 3658.3,2766.02 ccw(c3722.32,2702) S4.2@3631.79,2702 ; D23.2@4416.19,3278.4 cw(c4382.86,3245.06) 4430,3245.06 cw(c4477.14,3245.06) D23.2@4443.81,3278.4
  Top Layer w30: S4.2@3571.3,2232.98 ccw(c3515.82,2288.46) 3594.29,2288.46 ccw(c3672.75,2288.46) S4.2@3617.27,2232.98 ; S4.2@3571.3,2679.02 cw(c3515.82,2623.54) 3594.29,2623.54 cw(c3672.75,2623.54) S4.2@3617.27,2679.02 ; S4.2@3594.29,2210 S4.2@3594.29,2702
NetD24_2: D24.2 S5.2 | length 2501.5
  Top Layer w20: S5.2@3102.86,2702 3175.86,2775 3607.57,2775 3637.57,2805 4045.15,2805 4075.15,2835 4265,2835 4300,2870 D24.2 ; D24.2@4286.19,3278.4 cw(c4252.86,3245.06) 4300,3245.06 cw(c4347.14,3245.06) D24.2@4313.81,3278.4
  Top Layer w30: S5.2@3079.88,2232.98 ccw(c3024.4,2288.46) 3102.86,2288.46 ccw(c3181.32,2288.46) S5.2@3125.84,2232.98 ; S5.2@3079.88,2679.02 cw(c3024.4,2623.54) 3102.86,2623.54 cw(c3181.32,2623.54) S5.2@3125.84,2679.02 ; S5.2@3102.86,2210 S5.2@3102.86,2702
NetD25_2: D25.2 S6.2 | length 2995.5
  Top Layer w20: S6.2@2611.43,2702 2684.43,2775 3133.43,2775 3163.43,2805 3595.15,2805 3625.15,2835 4032.72,2835 4062.72,2865 4145,2865 4175,2895 D25.2 ; S6.2@2611.43,2739.5 ccw(c2611.43,2830.03) 2675.44,2766.02 ccw(c2739.46,2702) S6.2@2648.93,2702 ; D25.2@4161.19,3278.4 cw(c4127.86,3245.06) 4175,3245.06 cw(c4222.14,3245.06) D25.2@4188.81,3278.4
  Top Layer w30: S6.2@2588.45,2232.98 ccw(c2532.97,2288.46) 2611.43,2288.46 ccw(c2689.89,2288.46) S6.2@2634.41,2232.98 ; S6.2@2588.45,2679.02 cw(c2532.97,2623.54) 2611.43,2623.54 cw(c2689.89,2623.54) S6.2@2634.41,2679.02 ; S6.2@2611.43,2210 S6.2@2611.43,2702
NetD26_2: D26.2 R3.2 | length 247
  Bottom Layer w20: R3.2 D26.2 ; R3.2@2255.07,4582.93 cw(c2272.14,4565.86) 2272.14,4590 cw(c2272.14,4614.14) R3.2@2255.07,4597.07 ; D26.2@2378.98,4578.98 ccw(c2352.36,4552.36) 2352.36,4590 ccw(c2352.36,4627.64) D26.2@2378.98,4601.02
SEG1: D17.5 D18.11 D19.11 | length 3621.4
  Top Layer w12: D18.11@2598.03,4213.03 cw(c2557.06,4172.06) 2615,4172.06 cw(c2672.94,4172.06) D18.11@2631.97,4213.03 ; v1@2609.34,3855.66 ccw(c2595.69,3869.31) 2615,3869.31 ccw(c2634.31,3869.31) v1@2620.66,3855.66 ; v1(2615,3850) D18.11 ; D17.5@3528.11,3430.36 ccw(c3511.47,3447) 3535,3447 ccw(c3558.53,3447) D17.5@3541.89,3430.36 ; v1@3529.34,3844.34 cw(c3515.69,3830.69) 3535,3830.69 cw(c3554.31,3830.69) v1@3540.66,3844.34 ; D17.5 v1(3535,3850) ; D19.11@4568.03,4213.03 cw(c4527.06,4172.06) 4585,4172.06 cw(c4642.94,4172.06) D19.11@4601.97,4213.03 ; v1@4579.34,3855.66 ccw(c4565.69,3869.31) 4585,3869.31 ccw(c4604.31,3869.31) v1@4590.66,3855.66 ; v1(4585,3850) D19.11
  Bottom Layer w12: v1(2615,3850) v1(4585,3850) ; v1@2620.66,3844.34 cw(c2634.31,3830.69) 2634.31,3850 cw(c2634.31,3869.31) v1@2620.66,3855.66 ; v1@3529.34,3844.34 ccw(c3515.69,3830.69) 3515.69,3850 ccw(c3515.69,3869.31) v1@3529.34,3855.66 ; v1@3540.66,3844.34 cw(c3554.31,3830.69) 3554.31,3850 cw(c3554.31,3869.31) v1@3540.66,3855.66 ; v1@4579.34,3844.34 ccw(c4565.69,3830.69) 4565.69,3850 ccw(c4565.69,3869.31) v1@4579.34,3855.66
SEG2: D17.6 D18.7 D19.7 D20.1 | length 4354.8
  Top Layer w12: D18.7@2998.03,4213.03 cw(c2957.06,4172.06) 3015,4172.06 cw(c3072.94,4172.06) D18.7@3031.97,4213.03 ; v1@3009.34,3915.66 ccw(c2995.69,3929.31) 3015,3929.31 ccw(c3034.31,3929.31) v1@3020.66,3915.66 ; v1(3015,3910) D18.7 ; D17.6@3478.11,3430.36 ccw(c3461.47,3447) 3485,3447 ccw(c3508.53,3447) D17.6@3491.89,3430.36 ; v1@3479.34,3904.34 cw(c3465.69,3890.69) 3485,3890.69 cw(c3504.31,3890.69) v1@3490.66,3904.34 ; D17.6 v1(3485,3910) ; D19.7@4968.03,4213.03 cw(c4927.06,4172.06) 4985,4172.06 cw(c5042.94,4172.06) D19.7@5001.97,4213.03 ; v1@4979.34,3915.66 ccw(c4965.69,3929.31) 4985,3929.31 ccw(c5004.31,3929.31) v1@4990.66,3915.66 ; v1(4985,3910) D19.7
  Top Layer w20: D20.1 5020,3430 5050,3460 5050,3845 v1(4985,3910) ; D20.1@4843.65,3416.19 cw(c4876.99,3382.86) 4876.99,3430 cw(c4876.99,3477.14) D20.1@4843.65,3443.81
  Bottom Layer w12: v1(3015,3910) v1(3485,3910) v1(4985,3910) ; v1@3020.66,3904.34 cw(c3034.31,3890.69) 3034.31,3910 cw(c3034.31,3929.31) v1@3020.66,3915.66 ; v1@3479.34,3904.34 ccw(c3465.69,3890.69) 3465.69,3910 ccw(c3465.69,3929.31) v1@3479.34,3915.66 ; v1@3490.66,3904.34 cw(c3504.31,3890.69) 3504.31,3910 cw(c3504.31,3929.31) v1@3490.66,3915.66 ; v1@4979.34,3904.34 ccw(c4965.69,3890.69) 4965.69,3910 ccw(c4965.69,3929.31) v1@4979.34,3915.66
SEG3: D17.7 D18.4 D19.4 D21.1 | length 3510.6
  Top Layer w12: D18.4@2798.03,3646.97 ccw(c2757.06,3687.94) 2815,3687.94 ccw(c2872.94,3687.94) D18.4@2831.97,3646.97 ; v1@2809.34,3784.34 cw(c2795.69,3770.69) 2815,3770.69 cw(c2834.31,3770.69) v1@2820.66,3784.34 ; D18.4 v1(2815,3790) ; D17.7@3428.11,3430.36 ccw(c3411.47,3447) 3435,3447 ccw(c3458.53,3447) D17.7@3441.89,3430.36 ; v1@3429.34,3784.34 cw(c3415.69,3770.69) 3435,3770.69 cw(c3454.31,3770.69) v1@3440.66,3784.34 ; D17.7 v1(3435,3790) ; D19.4@4768.03,3646.97 ccw(c4727.06,3687.94) 4785,3687.94 ccw(c4842.94,3687.94) D19.4@4801.97,3646.97 ; v1@4779.34,3784.34 cw(c4765.69,3770.69) 4785,3770.69 cw(c4804.31,3770.69) v1@4790.66,3784.34 ; D19.4 v1(4785,3790)
  Top Layer w20: D21.1@4676.19,3443.81 ccw(c4642.86,3477.14) 4690,3477.14 ccw(c4737.14,3477.14) D21.1@4703.81,3443.81 ; D21.1 4690,3535 D19.4 ; 4742.32,3587.32 ccw(c4699.64,3630) D19.4@4760,3630 ; 4754.39,3599.39 cw(c4780,3573.79) D19.4@4780,3610
  Bottom Layer w12: v1(2815,3790) v1(4785,3790) ; v1@2820.66,3784.34 cw(c2834.31,3770.69) 2834.31,3790 cw(c2834.31,3809.31) v1@2820.66,3795.66 ; v1@3429.34,3784.34 ccw(c3415.69,3770.69) 3415.69,3790 ccw(c3415.69,3809.31) v1@3429.34,3795.66 ; v1@3440.66,3784.34 cw(c3454.31,3770.69) 3454.31,3790 cw(c3454.31,3809.31) v1@3440.66,3795.66 ; v1@4779.34,3784.34 ccw(c4765.69,3770.69) 4765.69,3790 ccw(c4765.69,3809.31) v1@4779.34,3795.66
SEG4: D17.8 D18.2 D19.2 D22.1 | length 3330
  Top Layer w12: D18.2@2598.03,3646.97 ccw(c2557.06,3687.94) 2615,3687.94 ccw(c2672.94,3687.94) D18.2@2631.97,3646.97 ; v1@2609.34,3719.34 cw(c2595.69,3705.69) 2615,3705.69 cw(c2634.31,3705.69) v1@2620.66,3719.34 ; D18.2 v1(2615,3725) ; D17.8@3378.11,3430.36 ccw(c3361.47,3447) 3385,3447 ccw(c3408.53,3447) D17.8@3391.89,3430.36 ; v1@3379.34,3719.34 cw(c3365.69,3705.69) 3385,3705.69 cw(c3404.31,3705.69) v1@3390.66,3719.34 ; D17.8 v1(3385,3725) ; D19.2@4568.03,3646.97 ccw(c4527.06,3687.94) 4585,3687.94 ccw(c4642.94,3687.94) D19.2@4601.97,3646.97 ; v1@4579.34,3719.34 cw(c4565.69,3705.69) 4585,3705.69 cw(c4604.31,3705.69) v1@4590.66,3719.34 ; D19.2 v1(4585,3725)
  Top Layer w20: D22.1@4556.03,3443.81 ccw(c4486.11,3513.74) 4585,3513.74 ; D22.1 4585,3455 D19.2 ; D22.1@4570.18,3429.67 ccw(c4534.39,3465.45) 4585,3465.45 ; D19.2@4570.86,3615.86 cw(c4536.72,3581.72) 4585,3581.72 cw(c4633.28,3581.72) D19.2@4599.14,3615.86
  Bottom Layer w12: v1(2615,3725) v1(4585,3725) ; v1@2620.66,3719.34 cw(c2634.31,3705.69) 2634.31,3725 cw(c2634.31,3744.31) v1@2620.66,3730.66 ; v1@3379.34,3719.34 ccw(c3365.69,3705.69) 3365.69,3725 ccw(c3365.69,3744.31) v1@3379.34,3730.66 ; v1@3390.66,3719.34 cw(c3404.31,3705.69) 3404.31,3725 cw(c3404.31,3744.31) v1@3390.66,3730.66 ; v1@4579.34,3719.34 ccw(c4565.69,3705.69) 4565.69,3725 ccw(c4565.69,3744.31) v1@4579.34,3730.66
SEG5: D17.9 D18.1 D19.1 D23.1 | length 3330.4
  Top Layer w12: D18.1@2498.03,3646.97 ccw(c2457.06,3687.94) 2515,3687.94 ccw(c2572.94,3687.94) D18.1@2531.97,3646.97 ; v1@2508.07,3691 cw(c2485.94,3678.22) 2510.62,3671.61 ; v1@2509.34,3689.34 cw(c2495.69,3675.69) 2515,3675.69 cw(c2534.31,3675.69) v1@2520.66,3689.34 ; v1@2511,3688.07 cw(c2504.46,3676.75) 2517.09,3680.13 ; 2512.91,3680.13 cw(c2525.54,3676.75) v1@2519,3688.07 ; D18.1 v1(2515,3695) ; 2519.38,3671.61 cw(c2544.06,3678.22) v1@2521.93,3691 ; D17.9@3328.11,3430.36 ccw(c3311.47,3447) 3335,3447 ccw(c3358.53,3447) D17.9@3341.89,3430.36 ; v1@3329.34,3689.34 cw(c3315.69,3675.69) 3335,3675.69 cw(c3354.31,3675.69) v1@3340.66,3689.34 ; D17.9 v1(3335,3695) ; D19.1@4468.03,3646.97 ccw(c4427.06,3687.94) 4485,3687.94 ccw(c4542.94,3687.94) D19.1@4501.97,3646.97 ; v1@4478.07,3691 cw(c4455.94,3678.22) 4480.62,3671.61 ; v1@4479.34,3689.34 cw(c4465.69,3675.69) 4485,3675.69 cw(c4504.31,3675.69) v1@4490.66,3689.34 ; v1@4481,3688.07 cw(c4474.46,3676.75) 4487.09,3680.13 ; 4482.91,3680.13 cw(c4495.54,3676.75) v1@4489,3688.07 ; D19.1 v1(4485,3695) ; 4489.38,3671.61 cw(c4514.06,3678.22) v1@4491.93,3691
  Top Layer w20: D23.1 4485,3485 D19.1 ; D23.1@4439.84,3449.53 ccw(c4439.84,3472.91) D23.1@4456.38,3456.38 ; D23.1@4459.37,3430 cw(c4530.28,3430) 4480.14,3480.14 ; D19.1@4470.86,3615.86 cw(c4436.72,3581.72) 4485,3581.72 cw(c4533.28,3581.72) D19.1@4499.14,3615.86
  Bottom Layer w12: v1(2515,3695) v1(4485,3695) ; v1@2520.66,3689.34 cw(c2534.31,3675.69) 2534.31,3695 cw(c2534.31,3714.31) v1@2520.66,3700.66 ; v1@3329.34,3689.34 ccw(c3315.69,3675.69) 3315.69,3695 ccw(c3315.69,3714.31) v1@3329.34,3700.66 ; v1@3340.66,3689.34 cw(c3354.31,3675.69) 3354.31,3695 cw(c3354.31,3714.31) v1@3340.66,3700.66 ; v1@4479.34,3689.34 ccw(c4465.69,3675.69) 4465.69,3695 ccw(c4465.69,3714.31) v1@4479.34,3700.66
SEG6: D17.10 D18.10 D19.10 D24.1 | length 4221.6
  Top Layer w12: D18.10@2698.03,4213.03 cw(c2657.06,4172.06) 2715,4172.06 cw(c2772.94,4172.06) D18.10@2731.97,4213.03 ; v1@2709.34,3885.66 ccw(c2695.69,3899.31) 2715,3899.31 ccw(c2734.31,3899.31) v1@2720.66,3885.66 ; v1(2715,3880) D18.10 ; D17.10@3278.11,3430.36 ccw(c3261.47,3447) 3285,3447 ccw(c3308.53,3447) D17.10@3291.89,3430.36 ; v1@3279.34,3874.34 cw(c3265.69,3860.69) 3285,3860.69 cw(c3304.31,3860.69) v1@3290.66,3874.34 ; D17.10 v1(3285,3880) ; D24.1@4283.36,3446.64 ccw(c4243.2,3486.8) 4300,3486.8 ccw(c4356.8,3486.8) D24.1@4316.64,3446.64 ; v1@4294.34,3874.34 cw(c4280.69,3860.69) 4300,3860.69 cw(c4319.31,3860.69) v1@4305.66,3874.34 ; D24.1 v1(4300,3880) ; D19.10@4668.03,4213.03 cw(c4627.06,4172.06) 4685,4172.06 cw(c4742.94,4172.06) D19.10@4701.97,4213.03 ; v1@4679.34,3885.66 ccw(c4665.69,3899.31) 4685,3899.31 ccw(c4704.31,3899.31) v1@4690.66,3885.66 ; v1(4685,3880) D19.10
  Bottom Layer w12: v1(2715,3880) v1(3285,3880) v1(4685,3880) ; v1@2720.66,3874.34 cw(c2734.31,3860.69) 2734.31,3880 cw(c2734.31,3899.31) v1@2720.66,3885.66 ; v1@3279.34,3874.34 ccw(c3265.69,3860.69) 3265.69,3880 ccw(c3265.69,3899.31) v1@3279.34,3885.66 ; v1@3290.66,3874.34 cw(c3304.31,3860.69) 3304.31,3880 cw(c3304.31,3899.31) v1@3290.66,3885.66 ; v1@4294.34,3874.34 ccw(c4280.69,3860.69) 4280.69,3880 ccw(c4280.69,3899.31) v1@4294.34,3885.66 ; v1@4305.66,3874.34 cw(c4319.31,3860.69) 4319.31,3880 cw(c4319.31,3899.31) v1@4305.66,3885.66 ; v1@4679.34,3874.34 ccw(c4665.69,3860.69) 4665.69,3880 ccw(c4665.69,3899.31) v1@4679.34,3885.66
SEG7: D17.11 D18.5 D19.5 D25.1 | length 3781.6
  Top Layer w12: D18.5@2898.03,3646.97 ccw(c2857.06,3687.94) 2915,3687.94 ccw(c2972.94,3687.94) D18.5@2931.97,3646.97 ; v1@2909.34,3814.34 cw(c2895.69,3800.69) 2915,3800.69 cw(c2934.31,3800.69) v1@2920.66,3814.34 ; D18.5 v1(2915,3820) ; D17.11@3228.11,3430.36 ccw(c3211.47,3447) 3235,3447 ccw(c3258.53,3447) D17.11@3241.89,3430.36 ; v1@3229.34,3814.34 cw(c3215.69,3800.69) 3235,3800.69 cw(c3254.31,3800.69) v1@3240.66,3814.34 ; D17.11 v1(3235,3820) ; D25.1@4158.36,3446.64 ccw(c4118.2,3486.8) 4175,3486.8 ccw(c4231.8,3486.8) D25.1@4191.64,3446.64 ; v1@4169.34,3814.34 cw(c4155.69,3800.69) 4175,3800.69 cw(c4194.31,3800.69) v1@4180.66,3814.34 ; D25.1 v1(4175,3820) ; D19.5@4868.03,3646.97 ccw(c4827.06,3687.94) 4885,3687.94 ccw(c4942.94,3687.94) D19.5@4901.97,3646.97 ; v1@4879.34,3814.34 cw(c4865.69,3800.69) 4885,3800.69 cw(c4904.31,3800.69) v1@4890.66,3814.34 ; D19.5 v1(4885,3820)
  Bottom Layer w12: v1(2915,3820) v1(3235,3820) v1(4885,3820) ; v1@2920.66,3814.34 cw(c2934.31,3800.69) 2934.31,3820 cw(c2934.31,3839.31) v1@2920.66,3825.66 ; v1@3229.34,3814.34 ccw(c3215.69,3800.69) 3215.69,3820 ccw(c3215.69,3839.31) v1@3229.34,3825.66 ; v1@3240.66,3814.34 cw(c3254.31,3800.69) 3254.31,3820 cw(c3254.31,3839.31) v1@3240.66,3825.66 ; v1@4169.34,3814.34 ccw(c4155.69,3800.69) 4155.69,3820 ccw(c4155.69,3839.31) v1@4169.34,3825.66 ; v1@4180.66,3814.34 cw(c4194.31,3800.69) 4194.31,3820 cw(c4194.31,3839.31) v1@4180.66,3825.66 ; v1@4879.34,3814.34 ccw(c4865.69,3800.69) 4865.69,3820 ccw(c4865.69,3839.31) v1@4879.34,3825.66
SEG8: D17.12 D18.3 D19.3 | length 3016.4
  Top Layer w12: D18.3@2698.03,3646.97 ccw(c2657.06,3687.94) 2715,3687.94 ccw(c2772.94,3687.94) D18.3@2731.97,3646.97 ; v1@2709.34,3749.34 cw(c2695.69,3735.69) 2715,3735.69 cw(c2734.31,3735.69) v1@2720.66,3749.34 ; D18.3 v1(2715,3755) ; D17.12@3178.11,3430.36 ccw(c3161.47,3447) 3185,3447 ccw(c3208.53,3447) D17.12@3191.89,3430.36 ; v1@3179.34,3749.34 cw(c3165.69,3735.69) 3185,3735.69 cw(c3204.31,3735.69) v1@3190.66,3749.34 ; D17.12 v1(3185,3755) ; D19.3@4668.03,3646.97 ccw(c4627.06,3687.94) 4685,3687.94 ccw(c4742.94,3687.94) D19.3@4701.97,3646.97 ; v1@4679.34,3749.34 cw(c4665.69,3735.69) 4685,3735.69 cw(c4704.31,3735.69) v1@4690.66,3749.34 ; D19.3 v1(4685,3755)
  Bottom Layer w12: v1(2715,3755) v1(4685,3755) ; v1@2720.66,3749.34 cw(c2734.31,3735.69) 2734.31,3755 cw(c2734.31,3774.31) v1@2720.66,3760.66 ; v1@3179.34,3749.34 ccw(c3165.69,3735.69) 3165.69,3755 ccw(c3165.69,3774.31) v1@3179.34,3760.66 ; v1@3190.66,3749.34 cw(c3204.31,3735.69) 3204.31,3755 cw(c3204.31,3774.31) v1@3190.66,3760.66 ; v1@4679.34,3749.34 ccw(c4665.69,3735.69) 4665.69,3755 ccw(c4665.69,3774.31) v1@4679.34,3760.66
SEG9: D9.1 D10.1 D11.1 D12.1 D13.1 D14.1 D15.1 D16.1 D17.13 | length 5598.9
  Top Layer w20: D17.13 v1(3135,3485) ; D9.1@5603.98,2521.02 ccw(c5577.36,2547.64) 5615,2547.64 ccw(c5652.64,2547.64) D9.1@5626.02,2521.02 ; D10.1@5603.98,2726.48 cw(c5577.36,2699.86) 5615,2699.86 cw(c5652.64,2699.86) D10.1@5626.02,2726.48 ; D10.1@5603.98,2748.52 ccw(c5577.36,2775.14) 5615,2775.14 ccw(c5652.64,2775.14) D10.1@5626.02,2748.52 ; D11.1@5603.98,2953.98 cw(c5577.36,2927.36) 5615,2927.36 cw(c5652.64,2927.36) D11.1@5626.02,2953.98 ; D11.1@5603.98,2976.02 ccw(c5577.36,3002.64) 5615,3002.64 ccw(c5652.64,3002.64) D11.1@5626.02,2976.02 ; D12.1@5603.98,3181.48 cw(c5577.36,3154.86) 5615,3154.86 cw(c5652.64,3154.86) D12.1@5626.02,3181.48 ; D12.1@5603.98,3203.52 ccw(c5577.36,3230.14) 5615,3230.14 ccw(c5652.64,3230.14) D12.1@5626.02,3203.52 ; D13.1@5603.98,3408.98 cw(c5577.36,3382.36) 5615,3382.36 cw(c5652.64,3382.36) D13.1@5626.02,3408.98 ; D9.1 D10.1 D11.1 D12.1 D13.1
  Bottom Layer w20: D14.1 D15.1 D16.1 v1(3135,3485) 5600,3485 5615,3470 D13.1 ; D14.1@1916.02,3473.98 cw(c1942.64,3447.36) 1942.64,3485 cw(c1942.64,3522.64) D14.1@1916.02,3496.02 ; D15.1@2088.98,3473.98 ccw(c2062.36,3447.36) 2062.36,3485 ccw(c2062.36,3522.64) D15.1@2088.98,3496.02 ; D15.1@2111.02,3473.98 cw(c2137.64,3447.36) 2137.64,3485 cw(c2137.64,3522.64) D15.1@2111.02,3496.02 ; D16.1@2283.98,3473.98 ccw(c2257.36,3447.36) 2257.36,3485 ccw(c2257.36,3522.64) D16.1@2283.98,3496.02 ; D16.1@2306.02,3473.98 cw(c2332.64,3447.36) 2332.64,3485 cw(c2332.64,3522.64) D16.1@2306.02,3496.02 ; D13.1@5603.98,3431.02 ccw(c5577.36,3457.64) 5615,3457.64 ccw(c5652.64,3457.64) D13.1@5626.02,3431.02
SEG10: D1.1 D2.1 D3.1 D4.1 D5.1 D6.1 D7.1 D8.1 D17.14 | length 4236.7
  Top Layer w20: D1.1 D2.1 3050,4580 3085,4545 ; D1.1@2656.02,4568.98 cw(c2682.64,4542.36) 2682.64,4580 cw(c2682.64,4617.64) D1.1@2656.02,4591.02 ; D2.1@2951.83,4568.97 ccw(c2925.22,4542.36) 2925.22,4580 ccw(c2925.22,4617.64) D2.1@2951.83,4591.02 ; D2.1@2973.88,4568.97 cw(c3000.5,4542.36) 3000.5,4580 cw(c3000.5,4617.64) D2.1@2973.88,4591.02 ; D17.14 3085,4545 ; D3.1@3269.69,4568.98 ccw(c3243.08,4542.36) 3243.08,4580 ccw(c3243.08,4617.64) D3.1@3269.69,4591.02 ; D3.1@3291.74,4568.98 cw(c3318.35,4542.36) 3318.35,4580 cw(c3318.35,4617.64) D3.1@3291.74,4591.02 ; D4.1@3587.55,4568.98 ccw(c3560.93,4542.36) 3560.93,4580 ccw(c3560.93,4617.64) D4.1@3587.55,4591.02 ; D4.1@3609.6,4568.98 cw(c3636.21,4542.36) 3636.21,4580 cw(c3636.21,4617.64) D4.1@3609.6,4591.02 ; D5.1@3905.4,4568.98 ccw(c3878.79,4542.36) 3878.79,4580 ccw(c3878.79,4617.64) D5.1@3905.4,4591.02 ; D5.1@3927.45,4568.98 cw(c3954.07,4542.36) 3954.07,4580 cw(c3954.07,4617.64) D5.1@3927.45,4591.02 ; D6.1@4223.26,4568.98 ccw(c4196.64,4542.36) 4196.64,4580 ccw(c4196.65,4617.64) D6.1@4223.26,4591.02 ; D6.1@4245.31,4568.98 cw(c4271.92,4542.36) 4271.92,4580 cw(c4271.92,4617.64) D6.1@4245.31,4591.02 ; D7.1@4541.12,4568.98 ccw(c4514.51,4542.36) 4514.51,4580 ccw(c4514.5,4617.64) D7.1@4541.12,4591.02 ; D7.1@4563.17,4568.98 cw(c4589.78,4542.36) 4589.78,4580 cw(c4589.78,4617.64) D7.1@4563.17,4591.02 ; D8.1@4858.98,4568.98 ccw(c4832.36,4542.36) 4832.36,4580 ccw(c4832.36,4617.64) D8.1@4858.98,4591.02 ; D8.1 D7.1 D6.1 D5.1 D4.1 D3.1 3120,4580 3085,4545
STB0: D17.28 P1.3 R1.1 | length 2349.2
  Top Layer w12: P1.3 2096,2861 3700,2861 3735,2896 D17.28 ; P1.3@1925,2714 ccw(c1925,2771.94) 1965.97,2730.97 ccw(c2006.94,2690) P1.3@1949,2690 ; D17.28@3728.11,3009.64 cw(c3711.47,2993) 3735,2993 cw(c3758.53,2993) D17.28@3741.89,3009.64
  Bottom Layer w30: P1.3 R1.1 ; P1.3@1935.61,2679.39 cw(c1961.21,2653.79) 1961.21,2690 cw(c1961.21,2726.21) P1.3@1935.61,2700.61
VCC: C1.1 C2.2 D17.4 D17.15 D26.1 P1.5 R1.2 R2.2 R4.2 | length 4329
  Top Layer w30: D26.1 2210,4310 v1(2210,2995) 3065,2995 3085,3015 D17.15 v1(3085,3105) ; 3031.2,2995 ccw(c3031.2,3070.33) D17.15@3084.47,3017.06 ; v1(3585,3335) D17.4
  Bottom Layer w30: P1.5@1914.39,2479.39 cw(c1888.79,2453.79) 1925,2453.79 cw(c1961.21,2453.79) P1.5@1935.61,2479.39 ; P1.5 1925,2435 1960,2400 2090,2400 2125,2435 C2.2 C1.1 R1.2 R2.2 R4.2 2125,2910 v1(2210,2995) ; R4.2@2130,2898 cw(c2171.04,2898) 2142.02,2927.02 ; v1(3085,3105) 3085,3290 3130,3335 v1(3585,3335)
pads on no net: 1. 2. 3. 4. 5. 6. D17.1 D17.2

## Keep-outs
Keep-Out Layer:
  lines w10: 1775,1945 5715,1945 5715,4695 1775,4695 1775,1945

## Silkscreen, mask and mechanical layers (free items; w line width, h text height)
Top Overlay:
  text "DIO" at 2010,2860 h60
  text "CLK" at 2010,2760 h60
  text "STB0" at 2010,2660 h60
  text "GND" at 2010,2560 h60
  text "5V" at 2010,2460 h60
  text "IoT_TM1638_171011" at 3300,2035 h60